# Altium PCB PCB1.PcbDoc
Units mil, origin at the board's own origin, x right, y up, seen from the top; angles counter-clockwise.
Board outline 3149.61 x 1968.5 mil, 2 copper layers (Top Layer, Bottom Layer); 38 components, 59 nets, 250 pads, 51 vias.
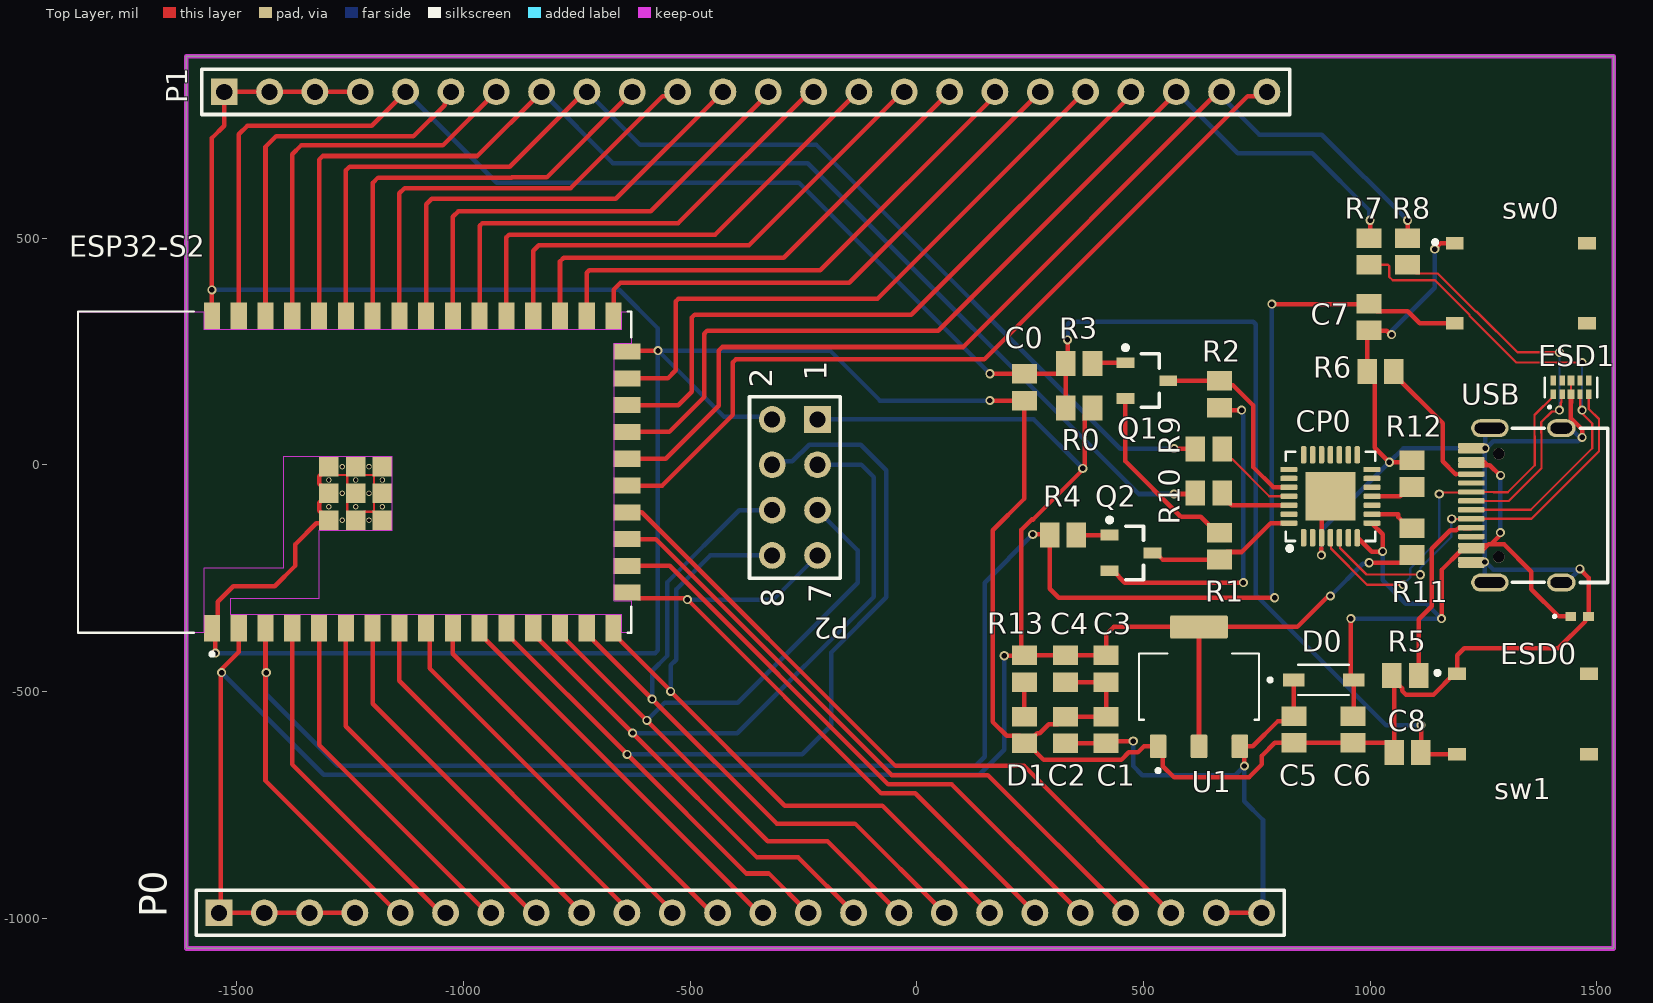
[diagram p0: Top Layer view]
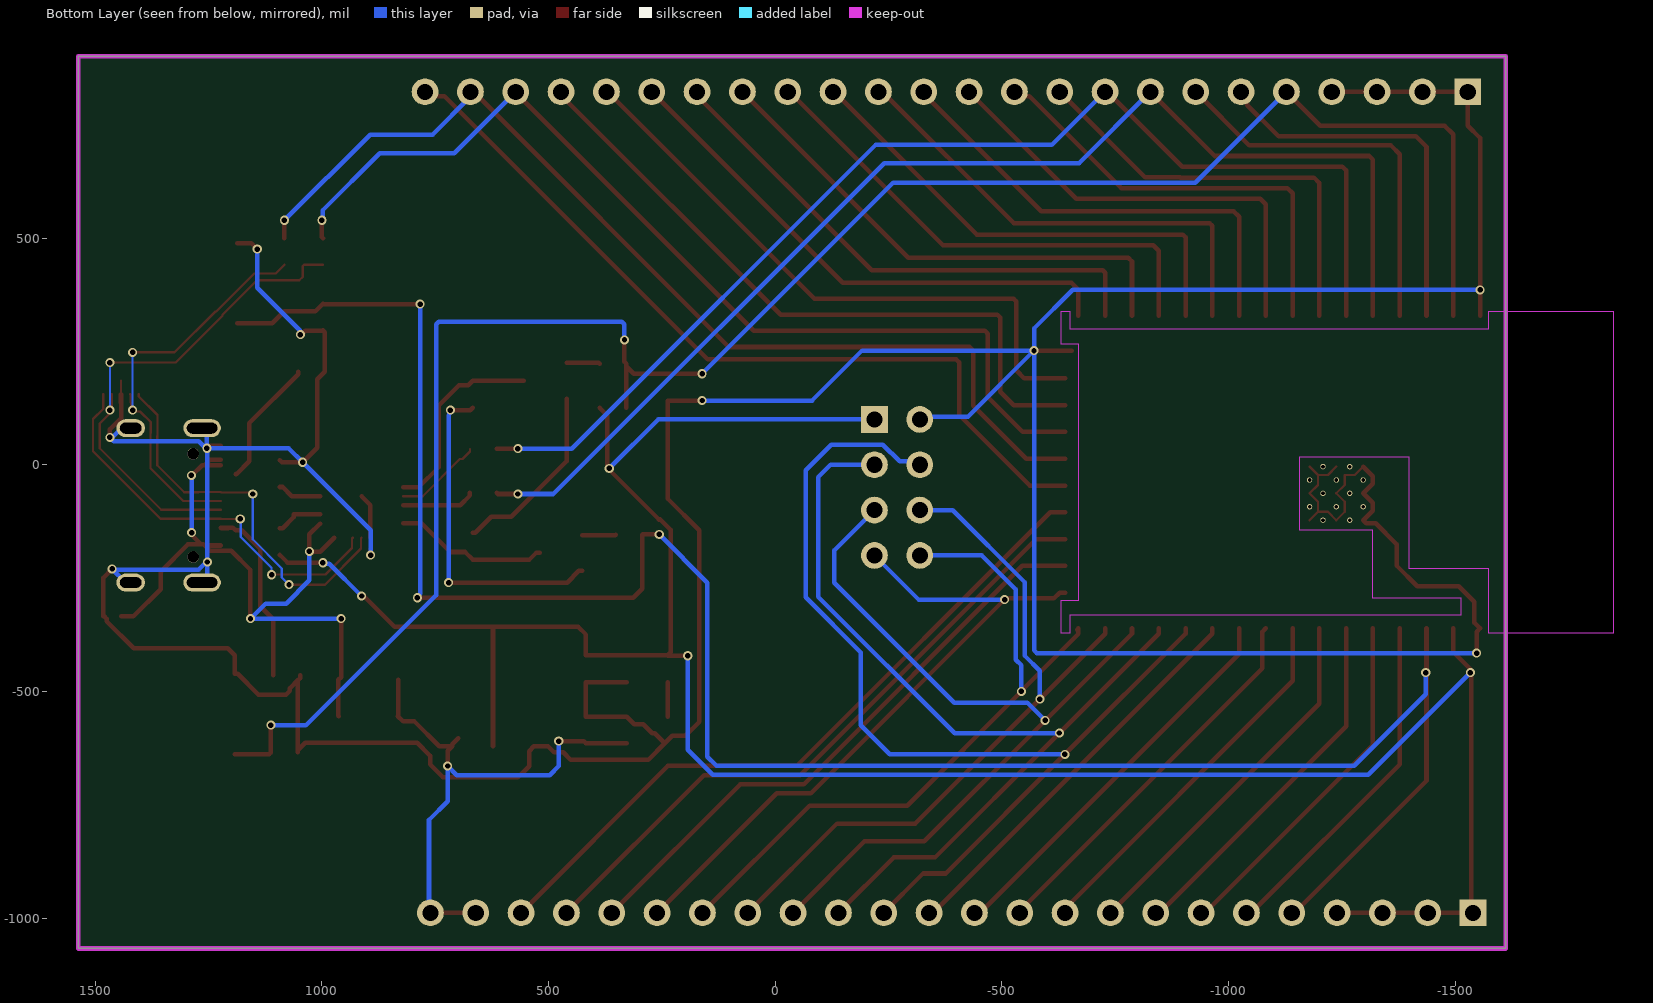
[diagram p1: Bottom Layer view, seen from below]

## Layer stack, top to bottom
Top Solder: solder mask 0.4, Solder Resist, Dk 3.5
Top Layer: signal copper 1.4
Dielectric 1: dielectric 12.6, FR-4, Dk 4.8
Bottom Layer: signal copper 1.4
Bottom Solder: solder mask 0.4, Solder Resist, Dk 3.5

## Board outline
-1611.81,-1067.01 -1611.81,901.5 1537.8,901.5 1537.8,-1067.01

## Design rules (kind name [scope] priority, off if disabled: settings)
Clearance [All] p1: gap=10 ignorepadtopadclearanceinfootprint=FALSE except(0: Arc-Hole Track-Hole SMDPad-Hole THPad-Hole Via-Hole Fill-Hole Poly-Hole Region-Hole Text-Hole)
DiffPairsRouting [All] p1: maxlimit=10 minlimit=3.5 mostfreqgap=10 toplayer_minwidth=15 toplayer_maxwidth=15 toplayer_prefwidth=15 bottomlayer_minwidth=15 bottomlayer_maxwidth=15 bottomlayer_prefwidth=15 maxuncoupledlength=500
PolygonConnect [All] p1: connectstyle=Relief reliefconductorwidth=10 reliefentries=4 polygonreliefangle="90 Angle" airgapwidth=10
RoutingVias [All] p1: holewidth=12 width=20 viastyle="Through Hole" minholewidth=12 minwidth=20 maxholewidth=12 maxwidth=20
SolderMaskExpansion [All] p1: expansion=4 istentingtop=FALSE
Width [All] p1: maxlimit=10 minlimit=3.5 preferedwidth=10 minimp=50.000000 maximp=50.000000 favimp=50.000000
29 further rules are at their usual default settings.

## Classes and differential pairs
net class pwr: GND VBUS VCC5 VCC33

## Components (designator, comment, footprint, x,y, rotation, side; value= is the part's Value field where it differs from the comment)
C0 "" C0805 237.56,170.98 r90 top value=1uF/10V(20)
C1 "" C0805 417.56,-584.96 r270 top value=10uF/25V(20%)
C2 "" C0805 327.56,-584.96 r270 top value=0.1uF/16V(10%)
C3 "" C0805 417.56,-449.96 r90 top value=10uF/25V(20%)
C4 "" C0805 327.56,-449.96 r90 top value=0.1uF/16V(10%)
C5 "" C0805 832.56,-584.02 r90 top value=10uF/25V(20%)
C6 "" C0805 962.56,-584.02 r90 top value=10uF/25V(20%)
C7 "" C0805 997.56,325.98 r90 top value=0.1uF/16V(10%)
C8 "" C0805 1082.56,-634.49 r0 top value=0.1uF/16V(10%)
CP0 "CP2102" QFN-28 912.56,-69.49 r90 top value=Value
D0 "1N5819HW-7" SOD3715X145N 897.56,-474.49 r0 top
D1 "LED0" C0805 237.56,-584.96 r270 top
ESD0 "TPD1E10B06DPYR" DIO_TPD1E05U06DPYR(X1Son) 1462.24,-334.49 r0 top
ESD1 "TPD4E05U06DQAR" TI_TPD4E05U06DQAR(USON10) 1443.19,170.67 r90 top
ESP32-S2 "ESP32-S2-WROVER" MODULE_ESP32-S2-WROVER -1239.76,-16.22 r90 top
P0 "Header 24" HDR1X24 -1539.37,-988.27 r0 top
P1 "Header 24" HDR1X24 -1527.56,822.76 r0 top
P2 "Header 4X2" HDR2X4 -218.9,100 r270 top
Q1 "L8050QLT1G" SOT100P237X110-3N 507.56,185.51 r0 top
Q2 "L8050QLT1G" SOT100P237X110-3N 472.56,-194.49 r0 top
R0 "" C0805 358.03,125.51 r0 top value=10k(1%)
R1 "" C0805 667.56,-179.49 r90 top value=10k(1%)
R2 "" C0805 667.56,155.51 r270 top value=10k(1%)
R3 "" C0805 358.03,223.01 r180 top value=0(1%)
R4 "" C0805 322.56,-154.49 r180 top value=0(1%)
R5 "" C0805 1077.56,-464.49 r0 top value=5.1K
R6 "" C0805 1023.03,205.51 r0 top value=5.1K
R7 "" C0805 997.56,470.51 r90 top value=0(1%)
R8 "" C0805 1082.56,470.51 r90 top value=0(1%)
R9 "" C0805 643.94,35.07 r180 top value=0(1%)
R10 "" C0805 643.94,-61.76 r180 top value=0(1%)
R11 "" C0805 1092.56,-169.49 r270 top value=1K(1%)
R12 "" C0805 1092.56,-19.49 r90 top value=10K(1%)
R13 "" C0805 237.56,-449.96 r270 top value=5.1K(1%)
sw0 "SWITCH6*6*5" SWITCH6*6*5 1332.56,400.51 r0 top
sw1 "SWITCH6*6*5" SWITCH6*6*5 1337.56,-549.49 r0 top
U1 "AMS1117" SOT229P700X180-4N 622.56,-489.49 r90 top
USB "Type-C" TYPE-C-TOP 1322.56,-89.49 r0 top

## Footprints (in the part's own frame and the unit in brackets; to place one, negate y for a bottom-side part, rotate by r counter-clockwise, add the part's x,y. Pads: shape width x height; smd on the part's side, far side on the other; paste and mask are expansions set on the pad)
C0805 [mm] "Chip Capacitor, Body 2.0x1.3mm, IPC High Density"
  rect 1.1x1.4 smd: 1(-0.75,0) 2(0.75,0)
  body extent -1.1,-0.72 1.1,0.72, height 1.4
DIO_TPD1E05U06DPYR(X1Son) [mm]
  rect 0.6x0.5 smd: 1(-0.5,0) 2(0.5,0)
  silkscreen extent -1.47,-0.07 -1.32,0.07
HDR1X24 [mm] "Connector; Header; 24 Position"
  rect 1.5x1.5 hole 0.9: 1(0,0)
  round 1.5 hole 0.9: 2(2.54,0) 3(5.08,0) 4(7.62,0) 5(10.16,0) 6(12.7,0) 7(15.24,0) 8(17.78,0) 9(20.32,0) 10(22.86,0) 11(25.4,0) 12(27.94,0) 13(30.48,0) 14(33.02,0) 15(35.56,0) 16(38.1,0) 17(40.64,0) 18(43.18,0) 19(45.72,0) 20(48.26,0) 21(50.8,0) 22(53.34,0) 23(55.88,0) 24(58.42,0)
  silkscreen extent -1.27,-1.27 59.69,1.27
HDR2X4 [mm] "Connector; Header; 4x2 Position"
  rect 1.5x1.5 hole 0.9: 1(0,0)
  round 1.5 hole 0.9: 2(0,-2.54) 3(2.54,0) 4(2.54,-2.54) 5(5.08,0) 6(5.08,-2.54) 7(7.62,0) 8(7.62,-2.54)
  silkscreen extent -1.27,-3.81 8.89,1.27
MODULE_ESP32-S2-WROVER [mm]
  rect 1.5x0.9 smd: 1(-8.75,8) 2(-8.75,6.5) 3(-8.75,5) 4(-8.75,3.5) 5(-8.75,2) 6(-8.75,0.5) 7(-8.75,-1) 8(-8.75,-2.5) 9(-8.75,-4) 10(-8.75,-5.5) 11(-8.75,-7) 12(-8.75,-8.5) 13(-8.75,-10) 14(-8.75,-11.5) 15(-8.75,-13) 16(-8.75,-14.5) 27(8.75,-14.5) 28(8.75,-13) 29(8.75,-11.5) 30(8.75,-10) 31(8.75,-8.5) 32(8.75,-7) 33(8.75,-5.5) 34(8.75,-4) 35(8.75,-2.5) 36(8.75,-1) 37(8.75,0.5) 38(8.75,2) 39(8.75,3.5) 40(8.75,5) 41(8.75,6.5) 42(8.75,8)
  rect 0.9x1.5 smd: 17(-6.75,-15.25) 18(-5.25,-15.25) 19(-3.75,-15.25) 20(-2.25,-15.25) 21(-0.75,-15.25) 22(0.75,-15.25) 23(2.25,-15.25) 24(3.75,-15.25) 25(5.25,-15.25) 26(6.75,-15.25)
  rect 1.1x1.1 smd: 43_1(-2.69,1.45) 43_2(-1.19,1.45) 43_3(0.31,1.45) 43_4(-2.69,-0.05) 43_5(-1.19,-0.05) 43_6(0.31,-0.05) 43_7(-2.69,-1.55) 43_8(-1.19,-1.55) 43_9(0.31,-1.55)
  round 0.3 hole 0.2: 43_10(-1.94,1.45) 43_11(-0.44,1.45) 43_12(-2.69,0.7) 43_13(-1.19,0.7) 43_14(0.31,0.7) 43_15(-1.94,-0.05) 43_16(-0.44,-0.05) 43_17(-2.69,-0.8) 43_18(-1.19,-0.8) 43_19(0.31,-0.8) 43_20(-1.94,-1.55) 43_21(-0.44,-1.55)
  Keep-Out Layer region: 9,8.45 8,8.45 8,-14.95 9,-14.95 9,-15.5 7.2,-15.5 7.2,-14.5 -7.2,-14.5 -7.2,-15.5 -9,-15.5 -9,-14.95 -8,-14.95 -8,6.95 -7.075,6.95 -7.075,2 -3.25,2 -3.25,-2.1 0.875,-2.1 0.875,4 -5.375,4 -5.375,8.45 -9,8.45 -9,15.5 9,15.5
  Keep-Out Layer region: 9,8.45 8,8.45 8,-14.95 9,-14.95 9,-15.5 7.2,-15.5 7.2,-14.5 -7.2,-14.5 -7.2,-15.5 -9,-15.5 -9,-14.95 -8,-14.95 -8,6.95 -7.075,6.95 -7.075,2 -3.25,2 -3.25,-2.1 0.875,-2.1 0.875,4 -5.375,4 -5.375,8.45 -9,8.45 -9,15.5 9,15.5
  silkscreen extent -10.3,-15.5 9,15.5, body extent -9,-15.55 9,15.45, height 3.3
QFN-28 [mil]
  rrect50% 38x12 smd mask+5: 1(-91.5,59.06) 2(-91.5,39.37) 3(-91.5,19.69) 4(-91.5,0) 5(-91.5,-19.68) 6(-91.5,-39.37) 7(-91.5,-59.06) 15(91.5,-59.06) 16(91.5,-39.37) 17(91.5,-19.68) 18(91.5,0) 19(91.5,19.69) 20(91.5,39.37) 21(91.5,59.06)
  rrect50% 12x38 smd mask+5: 8(-59.06,-91.5) 9(-39.37,-91.5) 10(-19.68,-91.5) 11(0,-91.5) 12(19.69,-91.5) 13(39.37,-91.5) 14(59.06,-91.5) 22(59.06,91.5) 23(39.37,91.5) 24(19.69,91.5) 25(0,91.5) 26(-19.68,91.5) 27(-39.37,91.5) 28(-59.06,91.5)
  rect 106.3x110.24 smd: 29(0,0)
  silkscreen extent -120,-98 99,99, body extent -98,-98 99,98, height 35
SOD3715X145N [mm]
  rect 1.21x0.73 smd: A(1.68,0) C(-1.68,0)
  silkscreen extent -3.1,-0.85 1.43,0.85, body extent -1.83,-0.77 1.83,0.77, height 0.8
SOT100P237X110-3N [mm] "SOT23, 3-Leads, Body 2.92x2.37mm, Pitch 1.00mm, IPC Medium Density"
  rect 1x0.6 smd: 1(-1.2,1) 2(-1.2,-1) 3(1.2,0)
  silkscreen extent -1.32,-1.5 0.7,1.97, body extent -0.7,-1.52 0.7,1.52, height 1.1
SOT229P700X180-4N [mm]
  rrect15% 1.31x0.93 smd: 1(-3.345,2.29) 2(-3.345,0) 3(-3.345,-2.29)
  rrect15% 1.31x3.24 smd: 4(3.345,0)
  silkscreen extent -4.8,-3.36 1.86,3.36
SWITCH6*6*5 [mm]
  rect 1x0.7 smd: 1(-3.7,2.25) 2(3.7,2.25) 3(-3.7,-2.25) 4(3.7,-2.25)
  silkscreen extent -4.9,2.2 -4.7,2.4, body extent -3,-3.07 3,2.95, height 4.5
TI_TPD4E05U06DQAR(USON10) [mm]
  rect 0.55x0.3 smd: 1(-0.385,1) 2(-0.385,0.5) 4(-0.385,-0.5) 5(-0.385,-1) 6(0.385,-1) 7(0.385,-0.5) 9(0.385,0.5) 10(0.385,1)
  rect 0.55x0.4 smd: 3(-0.385,0) 8(0.385,0)
  silkscreen extent -1.17,-1.46 0.55,1.46
TYPE-C-TOP [mm]
  round 0.65 hole 0.65: 0(-0.98,-2.89) 0(-0.98,2.89)
  oval 1.6x1 hole 0.6 slot 1.2 at 0 deg: 1(2.52,4.325) 2(2.52,-4.325)
  oval 2.1x1 hole 0.6 slot 1.7 at 0 deg: 3(-1.48,-4.325) 4(-1.48,4.325)
  rrect50% 1.5x0.3 smd: A1(-2.52,-3.35) A4(-2.52,-2.55) A5(-2.52,-1.25) A6(-2.52,-0.25) A7(-2.52,0.25) A8(-2.52,1.25) A9(-2.52,2.55) A12(-2.52,3.35) B1(-2.52,3.05) B4(-2.52,2.25) B5(-2.52,1.75) B6(-2.52,0.75) B7(-2.52,-0.75) B8(-2.52,-1.75) B9(-2.52,-2.25) B12(-2.52,-3.05)
  silkscreen extent -0.22,-4.33 5.12,4.33, body extent -2.57,-4.48 5.18,4.48, height 3.26

## Part data
C0 C1 C2 C3 C4 C5 C6 C7 C8: library part Cap, "Capacitor", LatestRevisionDate=17-Jul-2002, LatestRevisionNote="Re-released for DXP Platform.", PackageDescription="Radial Cap, Thru-Hole; 2 Leads; 0.3 in Pin Spacing", PackageReference=RAD-0.3, Published=8-Jun-2000, Publisher="Altium Limited"
CP0: "USB转TTL", MFG #1="SILICON LABS", PART DESC="SINGLE-CHIP USB TO UART BRIDGE, QFN28, RoHS.", PART NUMBER=CP2102, RefDes=RefDes, Type=DEV
D0: "Diode Schottky 40 V 1A Surface Mount SOD-123", Package="SOD-123 Fairchild Semiconductor", Availability="In Stock", Check_prices=https://www.snapeda.com/parts/1N5819HW-7/Diodes+Inc./view-part/?ref=eda, MF="Diodes Inc.", MP=1N5819HW-7, Price=None, Purchase-URL=https://pricing.snapeda.com/search/part/1N5819HW-7/?ref=eda, SnapEDA_Link=https://www.snapeda.com/parts/1N5819HW-7/Diodes+Inc./view-part/?ref=snap
D1: "Typical INFRARED GaAs LED", LatestRevisionDate=08-Jul-2005, LatestRevisionNote="Mech Layer 1 removed.", PackageDescription="LED; 2 Leads", PackageReference=LED-0, Published=8-Jun-2000, Publisher="Altium Limited"
ESD0: "Single-channel ESD in 0402 package with 10pF capacitance and 6-V breakdown 2-X1SON -40 to 125", Package="X1SON-2 Texas Instruments", Digi-Key_Part_Number=296-30406-1-ND, MF="Texas Instruments", MP=TPD1E10B06DPYR, SnapEDA_Link=https://www.snapeda.com/parts/TPD1E10B06DPYR/Texas%20Instruments/view-part/150568/?ref=snap, Texas_Instruments-Purchase-URL=https://snapeda.com/shop?store=Texas+Instruments&id=150568
ESD1: "14V Clamp 2.5A _8/20Âµs_ Ipp Tvs Diode Surface Mount 10-USON _2.5x1_", Package="UFDFN-10 Texas Instruments", Availability=Unavailable, MF="Texas Instruments", MP=TPD4E05U06DQAR, Price=None, SnapEDA_Link=https://www.snapeda.com/parts/TPD4E05U06DQAR/Texas%20Instruments/view-part/431231/?ref=snap
ESP32-S2: "WiFi 802.11b/g/n Transceiver Module 2.4GHz PCB Trace Surface Mount", Package=None, Availability="In Stock", Check_prices=https://www.snapeda.com/parts/ESP32-S2-WROVER/Espressif%20Systems/view-part/4614060/?ref=eda, MF="Espressif Systems", MP=ESP32-S2-WROVER, Price=None, SnapEDA_Link=https://www.snapeda.com/parts/ESP32-S2-WROVER/Espressif%20Systems/view-part/4614060/?ref=snap
P0 P1: "Header, 24-Pin", LatestRevisionDate=17-Jul-2002, LatestRevisionNote="Re-released for DXP Platform.", Publisher="Altium Limited"
P2: "Header, 4-Pin, Dual row", LatestRevisionDate=17-Jul-2002, LatestRevisionNote="Re-released for DXP Platform.", Publisher="Altium Limited"
Q1 Q2: library part 2N3904, "NPN General Purpose Amplifier", ComponentLink1Description="Manufacturer Link", ComponentLink1URL=http://www.fairchildsemi.com/, ComponentLink2Description=Datasheet, ComponentLink2URL=http://www.fairchildsemi.com/ds/2N%2F2N3904.pdf, DatasheetVersion=1997, LatestRevisionDate=15-Jan-2003, LatestRevisionNote="PCB Footprint 'BCY-W3/D4.7' replaced", PackageDescription="TO, Flat Index; 3 In-Line, Axial Leads; Body Dia. 4.5mm; Leads 0.51 x 0.48 mm (max)", PackageReference=TO-92A, PackageVersion=Sep-1998, Published=8-Jun-2000, Publisher="Altium Limited"
R0 R1 R2 R3 R4 R5 R6 R7 R8 R9 R10 R11 R12 R13: library part Res1, "Resistor", LatestRevisionDate=17-Jul-2002, LatestRevisionNote="Re-released for DXP Platform.", PackageDescription="Axial Device, Thru-Hole; 2 Leads; 0.3 in Pin Spacing", PackageReference=AXIAL-0.3, Published=8-Jun-2000, Publisher="Altium Limited"
U1: "UNO PLUS Arduino R3 Shield, Xbee Arduino IDE Wheeled Robotics Kit", Package="SOT-223 Seeed Technology", Availability=Unavailable, MF="Seeed Technology", MP=AMS1117, Price=None, SnapEDA_Link=https://www.snapeda.com/parts/AMS1117/Seeed%20Technology%20Co.%2C%20Ltd/view-part/184428/?ref=snap
USB: library part USB-Type-C-TOP

## Via types
v1: diameter 20, hole 12, Top Layer to Bottom Layer, 51 vias

## Nets (pads, with @x,y where several pads share a name; then routed paths per layer and width w, separated by ;. In a path a pad name is that pad's centre, name@x,y a point inside that pad or via, vN(x,y) a via of type N, cw(c..) or ccw(c..) an arc to the next point about the centre after c; other vN are vias at no path point)
CHIP_PU: C0.2 C8.2 ESP32-S2.41 P1.5 R0.1 R3.2 sw1.3 | length 4356
  Top Layer w10: ESP32-S2.41 -1495.67,728.74 -1476.38,748.03 -1202.28,748.03 P1.5 ; v1(161.42,200.79) 161.69,200.51 C0.2 311.85,200.51 R3.2@328.5,217.17 ; R0.1 R3.2@328.5,217.17 ; v1(332.56,275.51) 332.56,227.07 R3.2 R3.2@328.5,217.17 ; v1(1112.56,-574.49) 1112.56,-634.96 1115.67,-638.07 sw1.3
  Bottom Layer w10: P1.5 -926.85,622.05 -259.84,622.05 v1(161.42,200.79) ; v1(332.56,275.51) 332.56,309.65 338.42,315.51 742.17,315.51 748.03,309.65 748.03,-287.4 1035.12,-574.49 v1(1112.56,-574.49)
DTR: CP0.28 Q2.3 R1.1 | length 340.6
  Top Layer w10: Q2.3 527.68,-194.49 542.2,-209.02 R1.1 684.21,-192.36 716.68,-192.36 780.5,-128.54 CP0.28
EN_Auto: Q1.1 R3.1 | length 73.5
  Top Layer w10: R3.1 389.43,224.88 Q1.1
GND: C0.1 C1.1 C2.1 C3.1 C4.1 C5.1 C6.1 C7.1 C8.1 CP0.3 CP0.29 D1.2 ESD0.2 ESD1.3 ESD1.8 ESP32-S2.1 ESP32-S2.26 ESP32-S2.42 ESP32-S2.43_1 ESP32-S2.43_2 ESP32-S2.43_3 ESP32-S2.43_4 ESP32-S2.43_5 ESP32-S2.43_6 ESP32-S2.43_7 ESP32-S2.43_8 ESP32-S2.43_9 P1.1 P1.2 P1.3 P1.4 P2.2 R5.1 R6.1 R12.2 sw0.1 sw1.1 U1.1 USB.1 USB.2 USB.3 USB.4 USB.A1 USB.A12 USB.B1 USB.B12 | length 11134.4
  Top Layer w5: ESP32-S2.43_3 -1278.44,-22.42 -1256.2,-22.42 -1256.2,-44.67 ESP32-S2.43_5 -1256.2,-81.48 -1256.2,-103.72 ESP32-S2.43_4 -1219.39,-103.72 ESP32-S2.43_7@-1197.15,-103.72 ; ESP32-S2.43_6 -1219.39,-22.42 ESP32-S2.43_9@-1197.15,-22.42 ; ESP32-S2.43_7 ESP32-S2.43_7@-1197.15,-103.72 ; ESP32-S2.43_9 ESP32-S2.43_9@-1197.15,-22.42 ; ESD1.3 ESD1.8 ; ESP32-S2.43_7@-1197.15,-103.72 -1197.15,-81.48 ESP32-S2.43_8 -1197.15,-44.67 ESP32-S2.43_9@-1197.15,-22.42
  Top Layer w10: ESP32-S2.42 v1(-1554.72,385.83) -1554.72,720.87 -1527.56,748.03 P1.1 P1.4 ; v1(-1547.24,-415.35) -1547.24,-368.19 ESP32-S2.1 -1542.01,-347.99 -1542.01,-302.17 -1507.95,-268.11 -1416.31,-268.11 -1370.51,-222.32 -1370.51,-174.97 -1324.72,-129.17 -1303.9,-129.17 ESP32-S2.43_1 -1317.76,-101.22 -1317.76,-83.98 ESP32-S2.43_2 -1317.76,-42.17 -1317.76,-24.92 ESP32-S2.43_3 ; ESP32-S2.26@-653.9,251.97 v1(-570.87,251.97) ; v1(161.42,141.73) 237.28,141.73 C0.1 237.56,-74.49 167.91,-144.13 167.91,-567.27 198.48,-597.83 226.81,-597.83 D1.2@243.46,-614.49 ; C4.1 C3.1 C1.1 C2.1 310.91,-572.09 291.33,-572.09 271.33,-592.09 265.87,-592.09 D1.2@243.46,-614.49 ; v1(892.56,-199.49) 892.56,-184.47 ; CP0.3 892.87,-89.17 CP0.29 ; v1(1047.56,286.93) 1045.66,286.93 1037.08,295.51 998.5,295.51 C7.1 993.5,292.4 R6.1 1010.16,188.86 1010.16,37.91 v1(1042.56,5.51) 1088.03,5.51 R12.2 ; R5.1 1048.03,-470.39 R5.1@1053.03,-475.39 ; C8.1 C8.1@1053.03,-630.2 ; v1(1142.56,475.51) 1156.14,489.09 sw0.1 ; USB.A12 1246.97,42.4 1252.85,36.52 v1(1253.55,36.52) ; ESD1.3 1443.19,137.25 1442.7,136.77 1442.7,103.11 1467.56,78.26 v1(1467.56,60.51) ; v1(1462.56,-229.49) 1481.93,-248.86 ESD0.2 1479.96,-334.49 1475.12,-339.33 1475.12,-344.8 1415.43,-404.49 1207.56,-404.49 1191.89,-420.16 sw1.1 1185.98,-460.91 1139.84,-507.05 1079.22,-507.05 1070.43,-498.26 1070.43,-492.8 R5.1@1053.03,-475.39 ; D1.2@243.46,-614.49 280.12,-651.14 451.33,-651.14 467.98,-634.49 487.91,-634.49 501.22,-621.18 U1.1 542.96,-631.74 542.96,-664.89 567.56,-689.49 732.91,-689.49 761.46,-660.95 761.46,-642.09 790,-613.54 C5.1 C6.1 1036.38,-613.54 C8.1@1053.03,-630.2 ; C8.1@1053.03,-630.2 R5.1@1053.03,-475.39
  Bottom Layer w10: v1(-1554.72,385.83) -656.03,385.83 -570.87,300.66 v1(-570.87,251.97) ; v1(-1547.24,-415.35) -576.72,-415.35 -570.87,-409.5 v1(-570.87,251.97) ; P2.2 -325.2,106.3 -425.2,106.3 v1(-570.87,251.97) ; v1(161.42,141.73) -81.23,141.73 -191.46,251.97 v1(-570.87,251.97) ; v1(892.56,-199.49) 892.56,-144.49 v1(1042.56,5.51) 1073.57,36.52 v1(1253.55,36.52) ; v1(1047.56,286.93) 1047.56,295.51 1142.56,390.51 v1(1142.56,475.51) ; USB.3 1252.56,-248.03 v1(1252.56,-214.49) ; USB.4 1253.55,70.04 v1(1253.55,36.52) ; USB.2 1432.93,-259.76 1462.56,-230.14 v1(1462.56,-229.49) 1460.98,-231.06 1271.34,-231.06 1254.76,-214.49 v1(1252.56,-214.49) ; USB.1 1441.53,80.79 1459.89,62.43 1465.65,62.43 v1(1467.56,60.51) 1459.13,52.09 1271.82,52.09 1256.25,36.52 v1(1253.55,36.52) ; v1(1252.56,-214.49) 1253.05,-213.99 1253.05,36.03 v1(1253.55,36.52)
GPIO0: C7.2 ESP32-S2.3 P0.5 R4.2 sw0.3 | length 4727.2
  Top Layer w10: ESP32-S2.3 -1436.61,-697.24 -1145.59,-988.27 P0.5 ; v1(255.91,-153.54) 292.09,-153.54 R4.2 293.03,-273.35 313.03,-293.35 v1(789.33,-293.35) ; v1(783.46,354.33) 996.38,354.33 C7.2 1014.21,338.86 1082.7,338.86 1109.63,311.93 sw0.3
  Bottom Layer w10: v1(-1435.04,-458.66) -1435.04,-505.91 -1277.13,-663.82 129.54,-663.82 149.61,-643.75 149.61,-259.84 v1(255.91,-153.54) ; v1(783.46,354.33) 783.46,-284.77 789.33,-290.64 v1(789.33,-293.35)
GPIO1: ESP32-S2.4 P0.6 | length 774.1
  Top Layer w10: ESP32-S2.4 -1377.56,-661.02 -1050.32,-988.27 P0.6
GPIO2: ESP32-S2.5 P0.7 | length 789.6
  Top Layer w10: ESP32-S2.5 -1318.5,-617.72 -947.95,-988.27 P0.7
GPIO3: ESP32-S2.6 P0.8 | length 806.6
  Top Layer w10: ESP32-S2.6 -1259.45,-576.82 -848,-988.27 P0.8
GPIO4: ESP32-S2.7 P0.9 | length 818.5
  Top Layer w10: ESP32-S2.7 -1200.39,-527.17 -739.37,-988.19 P0.9
GPIO5: ESP32-S2.8 P0.10 | length 835.5
  Top Layer w10: ESP32-S2.8 -1141.34,-476.77 -639.37,-978.74 P0.10
GPIO6: ESP32-S2.9 P0.11 | length 852.4
  Top Layer w10: ESP32-S2.9 -1074.8,-368.19 -1074.8,-448.82 -539.37,-984.25 P0.11
GPIO7: ESP32-S2.10 P0.12 | length 876.7
  Top Layer w10: ESP32-S2.10 -1023.23,-416.93 -451.89,-988.27 P0.12
GPIO8: ESP32-S2.11 P0.13 | length 891.7
  Top Layer w10: ESP32-S2.11 -964.17,-372.52 -348.43,-988.27 P0.13
GPIO9: ESP32-S2.12 P0.14 P2.4 | length 2316.3
  Top Layer w10: ESP32-S2.12 -905.12,-372.52 v1(-638.82,-638.82) -376.06,-901.57 -326.06,-901.57 P0.14
  Bottom Layer w10: v1(-638.82,-638.82) -252.99,-638.82 -188.98,-574.8 -188.98,-414.11 -66.93,-292.06 -66.93,-11.81 -123.27,44.53 -237.34,44.53 -274.37,7.5 -311.4,7.5 P2.4
GPIO10: ESP32-S2.13 P0.15 P2.3 | length 2030.8
  Top Layer w10: ESP32-S2.13 -846.06,-372.52 -611.26,-607.32 -352.44,-866.14 -261.5,-866.14 P0.15
  Bottom Layer w10: v1(-626.97,-591.61) -626.06,-592.52 -395.67,-592.52 -94.49,-291.34 -94.49,-27.56 -122.05,0 P2.3
GPIO11: ESP32-S2.14 P0.16 P2.5 | length 1802.8
  Top Layer w10: ESP32-S2.14 -787.01,-372.52 v1(-595.51,-564.02) -328.82,-830.71 -196.93,-830.71 P0.16
  Bottom Layer w10: v1(-595.51,-564.02) -556.32,-524.82 -394.9,-524.82 -129.92,-259.84 -129.92,-188.98 P2.5
GPIO12: ESP32-S2.15 P0.17 P2.6 | length 1624.4
  Top Layer w10: ESP32-S2.15 -727.95,-372.52 -577.8,-522.68 -309.13,-791.34 -136.3,-791.34 P0.17
  Bottom Layer w10: v1(-583.66,-516.81) -583.66,-454.47 -550.87,-421.67 -550.87,-259.53 -391.34,-100 P2.6
GPIO13: ESP32-S2.16 P0.18 P2.8 | length 1574.1
  Top Layer w10: ESP32-S2.16@-666.18,-363.43 ESP32-S2.16 -668.9,-372.52 -543.13,-498.29 v1(-543.13,-499.82) -290.98,-751.97 -75.67,-751.97 P0.18
  Bottom Layer w10: v1(-543.13,-499.82) -543.13,-442.21 -530.87,-429.95 -530.87,-274.96 -455.91,-200 P2.8
GPIO14: ESP32-S2.17 P0.19 P2.7 | length 1519.8
  Top Layer w10: ESP32-S2.17 -627.56,-281.97 -614.84,-294.69 -511.17,-294.69 -508.57,-297.28 v1(-505.87,-297.28) -78.74,-724.41 -3.23,-724.41 P0.19
  Bottom Layer w10: v1(-505.87,-297.28) -316.18,-297.28 P2.7
GPIO15: ESP32-S2.18 P0.20 | length 1317
  Top Layer w10: ESP32-S2.18 -544.88,-222.91 -63.38,-704.41 76.77,-704.41 P0.20
GPIO16: ESP32-S2.19 P0.21 | length 1441.5
  Top Layer w10: ESP32-S2.19 -575.65,-163.86 -55.1,-684.41 156.77,-684.41 P0.21
GPIO17: ESP32-S2.20 P0.22 | length 1565.9
  Top Layer w10: ESP32-S2.20 -606.42,-104.8 -46.82,-664.41 236.77,-664.41 P0.22
GPIO18: ESP32-S2.21 P1.24 | length 1839.6
  Top Layer w10: ESP32-S2.21 -561.5,-45.75 -405.51,110.24 -405.51,226.43 -399.65,232.28 148.69,232.28 729.78,813.37 763.05,813.37 P1.24
GPIO19: ESP32-S2.22 P1.23 R8.2 | length 2292
  Top Layer w10: ESP32-S2.22 -553.62,13.31 -437.01,129.92 -437.01,251.97 -429.13,259.84 102.36,259.84 665.28,822.76 P1.23 ; R8.2 1082.68,500.16 v1(1082.68,539.37)
  Bottom Layer w10: P1.23 672.44,811.81 755.91,728.35 893.7,728.35 v1(1082.68,539.37)
GPIO20: ESP32-S2.23 P1.22 R7.2 | length 2203.1
  Top Layer w10: ESP32-S2.23 -545.75,72.36 -468.5,149.61 -468.5,289.42 -462.65,295.28 47.24,295.28 572.44,820.47 P1.22 ; R7.2 1000,502.48 v1(1000,539.37)
  Bottom Layer w10: P1.22 707.98,687.22 872.47,687.22 998.62,561.07 998.62,540.75 v1(1000,539.37)
GPIO21: ESP32-S2.24 P1.21 | length 1498.5
  Top Layer w10: ESP32-S2.24 -526.06,131.42 -496.06,161.42 -496.06,324.85 -490.21,330.71 -11.81,330.71 472.44,814.96 P1.21
GPIO26: ESP32-S2.25 P1.20 | length 1362.5
  Top Layer w10: ESP32-S2.25 -549.69,190.47 -531.5,208.66 -531.5,360.28 -525.64,366.14 -86.61,366.14 370,822.76 P1.20
GPIO33: ESP32-S2.27 P1.19 | length 1180.1
  Top Layer w10: ESP32-S2.27 -668.9,386.22 -653.54,401.57 -148.74,401.57 P1.19
GPIO34: ESP32-S2.28 P1.18 | length 1165.9
  Top Layer w10: ESP32-S2.28 -727.95,423.28 -722.09,429.13 -212.6,429.13 172.44,814.17 P1.18
GPIO35: ESP32-S2.29 P1.17 | length 1134.7
  Top Layer w10: ESP32-S2.29 -787.01,448.43 -778.74,456.69 -293.62,456.69 P1.17
GPIO36: ESP32-S2.30 P1.16 | length 1107.6
  Top Layer w10: ESP32-S2.30 -846.06,472.05 -833.86,484.25 -370.08,484.25 -31.57,822.76 P1.16
GPIO37: ESP32-S2.31 P1.15 | length 1084.2
  Top Layer w10: ESP32-S2.31 -905.12,502.02 -899.26,507.87 -444.88,507.87 -130,822.76 P1.15
GPIO38: ESP32-S2.32 P1.14 | length 1057.9
  Top Layer w10: ESP32-S2.32 -964.17,527.17 -958.07,533.27 -525.79,533.27 -236.3,822.76 P1.14
GPIO39: ESP32-S2.33 P1.13 | length 1031.3
  Top Layer w10: ESP32-S2.33 -1023.23,546.85 -1011.02,559.06 -586.61,559.06 -327.56,818.11 P1.13
GPIO40: ESP32-S2.34 P1.12 | length 1003.7
  Top Layer w10: ESP32-S2.34 -1082.28,574.41 -1070.08,586.61 -663.7,586.61 P1.12
GPIO41: ESP32-S2.35 P1.11 | length 977.1
  Top Layer w10: ESP32-S2.35 -1141.34,598.82 -1129.93,610.23 -763.79,610.23 -560.65,813.37 -536.95,813.37 P1.11
GPIO42: ESP32-S2.36 P1.10 | length 949.5
  Top Layer w10: ESP32-S2.36 -1200.39,621.65 -1188.39,633.66 -893.9,633.66 -893.7,633.86 -816.46,633.86 P1.10
GPIO45: ESP32-S2.39 P1.7 | length 863.9
  Top Layer w10: ESP32-S2.39 -1377.56,685.12 -1358.27,704.41 -1045.91,704.41 P1.7
GPIO46: ESP32-S2.40 P1.6 | length 841.5
  Top Layer w10: ESP32-S2.40 -1436.61,701.18 -1413.39,724.41 -1110.24,724.41 -1041.21,793.44 -1041.21,795.83 -1027.56,809.48 P1.6
IO0_Auto: Q2.1 R4.1 | length 73.5
  Top Layer w10: R4.1 352.72,-155.12 Q2.1
NetCP0_9: CP0.9 R11.1 | length 105.1
  Top Layer w10: CP0.9 1061.93,-108.86 1062.56,-109.49 1062.56,-115.87 1086.65,-139.96 R11.1
NetCP0_11: CP0.11 R12.1 | length 97
  Top Layer w10: CP0.11 1066.18,-69.49 1086.65,-49.02 R12.1
NetCP0_25: CP0.25 R9.1 | length 194.4
  Top Layer w5: R9.1 673.46,29.16 690.12,12.51 696.02,12.51 777.7,-69.17 820.74,-69.17 CP0.25
NetCP0_26: CP0.26 R10.1 | length 162.4
  Top Layer w10: R10.1 673.46,-67.66 694.97,-89.17 CP0.26
NetD1_1: D1.1 R13.2 | length 75.9
  Top Layer w10: D1.1 R13.2
NetQ1_2: Q1.2 R1.2 | length 411.2
  Top Layer w10: Q1.2 460.31,7.4 582.13,-114.42 626.11,-114.42 661.65,-149.96 R1.2
NetQ2_2: Q2.2 R2.2 | length 739.3
  Top Layer w10: Q2.2 433.19,-233.86 459.17,-259.84 v1(720.47,-259.84) ; R2.2 673.03,120.51 v1(716.77,120.51)
  Bottom Layer w10: v1(716.77,120.51) 718.69,118.6 718.69,111.53 720.47,109.74 v1(720.47,-259.84)
NetR5_2: R5.2 USB.A5 | length 415.1
  Top Layer w10: R5.2 1107.09,-340.67 1135.97,-311.79 1135.97,-185.3 1176.78,-144.49 1190.41,-144.49 1196.2,-138.7 USB.A5 1222.13,-139.92 USB.A5@1206.58,-139.92
NetR6_2: R6.2 USB.B5 | length 284.4
  Top Layer w10: R6.2 1052.56,199.61 1160.12,92.05 1160.12,7.41 1187.29,-19.76 1188.44,-19.76 1189.27,-20.59 1190.27,-20.59
RST: CP0.24 Q1.3 R2.1 | length 443.5
  Top Layer w10: Q1.3 667.09,185.51 R2.1 677.09,175.51 697.56,175.51 741.77,131.3 741.77,-4.96 785.99,-49.17 805.84,-49.17 806.47,-49.8 CP0.24
RXD0: ESP32-S2.38 P1.8 R10.2 | length 2716.5
  Top Layer w10: ESP32-S2.38 -1318.5,672.83 -1310.24,681.1 -969.21,681.1 P1.8 P1.8@-835.83,822.76 ; v1(567.56,-64.49) 611.68,-64.49 R10.2
  Bottom Layer w10: P1.8 -670.16,665.35 -240.16,665.35 489.68,-64.49 v1(567.56,-64.49)
TXD0: ESP32-S2.37 P1.9 R9.2 | length 2593
  Top Layer w10: ESP32-S2.37 -1259.45,649.21 -1251.18,657.48 -897.64,657.48 -732.36,822.76 P1.9 ; v1(567.56,35.51) 613.96,35.51 R9.2
  Bottom Layer w10: P1.9 -610.31,705.51 -221.26,705.51 448.74,35.51 v1(567.56,35.51)
USB_DM: ESD1.2 R8.1 USB.A7 | length 916.6
  Top Layer w5: R8.1 1101.71,421.83 1149.34,421.83 1232.97,338.21 1234.86,338.21 1325.06,248.01 v1(1417.56,248.01) ; USB.A7 1305.82,-79.65 1378.04,-7.42 1378.04,69.63 1377.78,69.9 1377.78,94.12 1401.3,117.64 1414.69,117.64 v1(1417.56,120.51) 1420.43,123.38 1420.43,136.77 1422.22,138.57 1422.22,154.92 ESD1.2@1422.81,155.51
  Bottom Layer w5: v1(1417.56,120.51) v1(1417.56,248.01)
USB_DM_CP: CP0.5 ESD1.5 USB.B7 | length 898.3
  Top Layer w5: CP0.5 933.43,-162.17 933.43,-183.41 992.01,-241.99 1110.34,-241.99 v1(1110.97,-242.61) ; v1(1180.06,-119.49) USB.B7 1356.06,-119.02 1505.06,29.98 1505.06,100.76 1482.56,123.26 ESD1.5
  Bottom Layer w5: v1(1110.97,-242.61) 1110.97,-227.33 1178.81,-159.49 1178.81,-120.74 v1(1180.06,-119.49)
USB_DP: ESD1.4 R7.1 USB.A6 | length 1132.5
  Top Layer w5: R7.1 1039.57,440.98 1042.5,438.06 1042.5,414.15 1049.82,406.83 1143.13,406.83 1219.07,330.89 1219.07,329 1322.56,225.51 v1(1467.56,225.51) ; USB.A6 1354.54,-99.33 1490.06,36.19 1490.06,91.08 1463.56,117.58 ESD1.4@1463.56,155.51
  Bottom Layer w5: v1(1467.56,120.51) v1(1467.56,225.51)
USB_DP_CP: CP0.4 ESD1.1 USB.B6 | length 860.6
  Top Layer w5: CP0.4 913.74,-162.17 913.74,-184.94 993.3,-264.49 v1(1072.56,-264.49) ; v1(1152.56,-64.49) 1155.81,-61.24 1222.07,-61.24 USB.B6 1271.46,-59.96 1272.34,-60.84 1303.41,-60.84 1363.04,-1.21 1363.04,63.41 1362.78,63.68 1362.78,109.55 1403.82,150.59 ESD1.1
  Bottom Layer w5: v1(1072.56,-264.49) 1088.47,-248.58 1088.47,-228.62 1152.56,-164.53 v1(1152.56,-64.49)
VBUS: C6.2 CP0.7 CP0.8 D0.A ESD0.1 USB.A4 USB.A9 USB.B4 USB.B9 | length 1604.6
  Top Layer w10: v1(957.56,-339.49) 957.56,-468.35 D0.A 963.7,-553.35 C6.2 ; CP0.7@972.93,-160.99 1003.69,-191.75 1017.75,-191.75 1018.57,-192.57 1025.65,-192.57 1027.56,-194.49 1027.56,-153.36 CP0.8@1004.06,-129.86 ; v1(1157.56,-339.49) 1157.56,-232.05 1199.72,-189.88 USB.A4 1246.97,-189.88 1258.78,-178.07 ; USB.B9 1258.78,-178.07 ; USB.B4 1258.78,-0.91 ; USB.A9 1246.97,10.91 1258.78,-0.91 ; v1(1287.56,-149.49) 1287.56,-154.69 1266.78,-175.47 ; v1(1287.87,-23.34) 1286.62,-23.34 1264.18,-0.91 1258.78,-0.91 ; ESD0.1 1415.75,-334.49 1355.62,-274.36 1355.62,-235.6 1295.49,-175.47 1266.78,-175.47 ; 1258.78,-178.07 1261.38,-175.47 1266.78,-175.47
  Bottom Layer w10: v1(957.56,-339.49) v1(1157.56,-339.49) 1124.28,-306.21 1078.92,-306.21 1027.56,-254.84 v1(1027.56,-191.07) ; v1(1287.56,-149.49) 1287.56,-23.66 v1(1287.87,-23.34)
VCC5: C1.2 C2.2 C5.2 D0.C P0.23 P0.24 U1.3 | length 1209.7
  Top Layer w10: C2.2 C1.2 422.56,-609.49 v1(477.56,-609.49) ; P0.23 P0.24 ; U1.3@699.41,-603.14 712.72,-616.45 U1.3 ; v1(722.56,-664.49) 722.56,-631.02 U1.3 ; D0.C 831.42,-553.35 C5.2 820.86,-566.19 795.86,-566.19 740.87,-621.18 U1.3
  Bottom Layer w10: v1(477.56,-609.49) 477.56,-664.49 497.56,-684.49 702.56,-684.49 v1(722.56,-664.49) 722.56,-742.24 763.78,-783.46 763.78,-985.12 P0.24
VCC33: C3.2 C4.2 ESP32-S2.2 P0.1 P0.2 P0.3 P0.4 P2.1 R0.2 R11.2 R13.1 U1.2 U1.4 | length 5512.4
  Top Layer w10: -1495.67,-412.99 -1535.43,-452.76 -1535.43,-984.33 P0.1 P0.2 P0.3 P0.4 ; -1495.67,-409.45 ESP32-S2.2 ; v1(192.91,-421.26) 236.73,-421.26 R13.1 230.91,-413.78 230.91,-143.19 253.38,-120.72 256.38,-120.72 v1@367.68,-9.41 ; R13.1@239.72,-420.43 C4.2 C3.2 417.56,-374.49 434.25,-357.8 U1.4 ; v1@370.91,-6.19 370.91,108.86 R0.2 ; U1.2 U1.4 ; v1(912.56,-289.49) 907.56,-289.49 839.25,-357.8 U1.4 ; v1(997.91,-216.07) 1037.91,-216.07 1038.32,-215.67 1075.91,-215.67 R11.2
  Bottom Layer w10: v1(-1533.46,-458.66) -1308.31,-683.82 137.82,-683.82 192.91,-628.73 v1(192.91,-421.26) ; P2.1 258.27,100 v1(366.14,-7.87) ; v1(912.56,-289.49) 984.06,-217.98 996,-217.98 v1(997.91,-216.07)
pads on no net: CP0.1 CP0.2 CP0.6 CP0.10 CP0.12 CP0.13 CP0.14 CP0.15 CP0.16 CP0.17 CP0.18 CP0.19 CP0.20 CP0.21 CP0.22 CP0.23 CP0.27 ESD1.6 ESD1.7 ESD1.9 ESD1.10 ESP32-S2.43_10 ESP32-S2.43_11 ESP32-S2.43_12 ESP32-S2.43_13 ESP32-S2.43_14 ESP32-S2.43_15 ESP32-S2.43_16 ESP32-S2.43_17 ESP32-S2.43_18 ESP32-S2.43_19 ESP32-S2.43_20 ESP32-S2.43_21 sw0.2 sw0.4 sw1.2 sw1.4 USB.0 USB.A8 USB.B8

## Keep-outs
Keep-Out Layer:
  the board outline again, w10

## Text inside footprints (layer, text, board x,y; h text height)
ESP32-S2: Mechanical 13 "ANTENNA" at -1702.36,-252.44 h70 r90
P2: Top Overlay "8" at -293.9,-315 h50 r90; Top Overlay "7" at -188.9,-305 h50 r90; Top Overlay "1" at -198.9,185 h50 r90; Top Overlay "2" at -318.9,170 h50 r90